# Altium PCB PCB1.PcbDoc
Units mm, origin at the board's own origin, x right, y up, seen from the top; angles counter-clockwise.
Board outline 80.23 x 55.21 mm, 2 copper layers (Top Layer, Bottom Layer), stack 1.671 mm thick; 128 components, 100 nets, 442 pads, 117 vias.
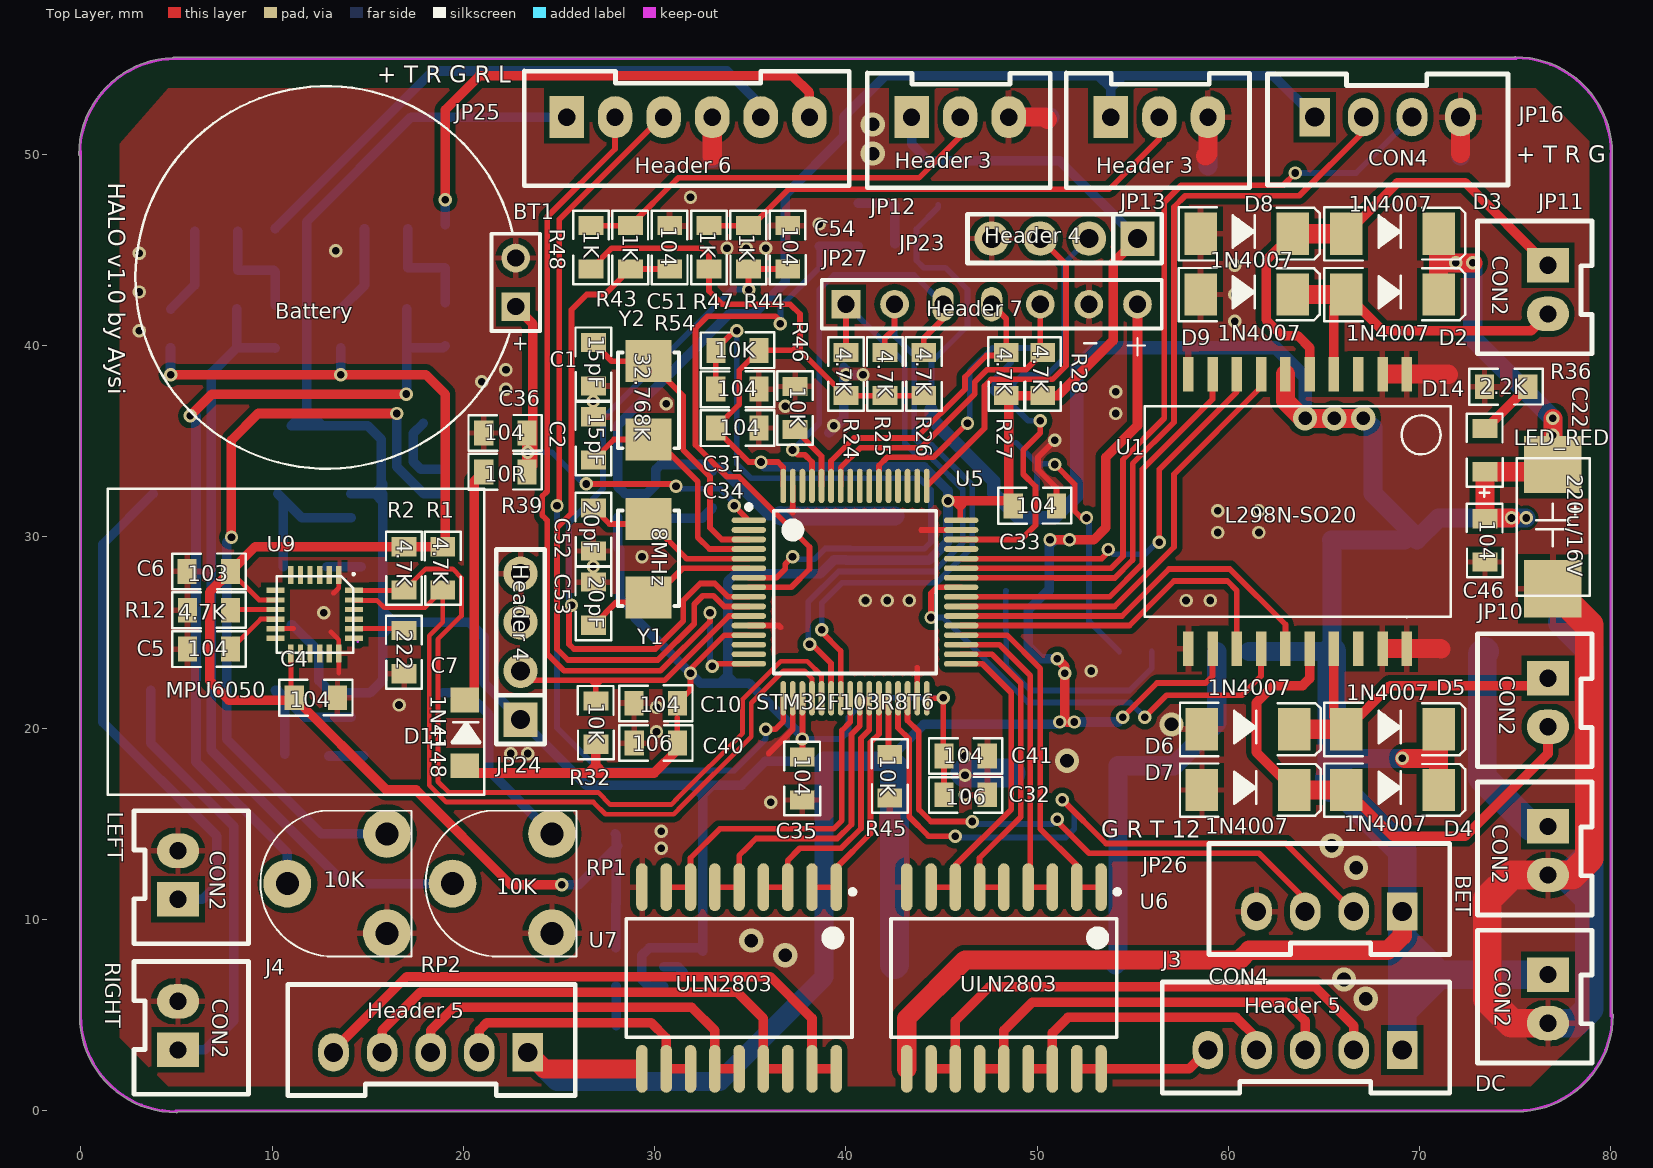
[diagram p0: Top Layer view]
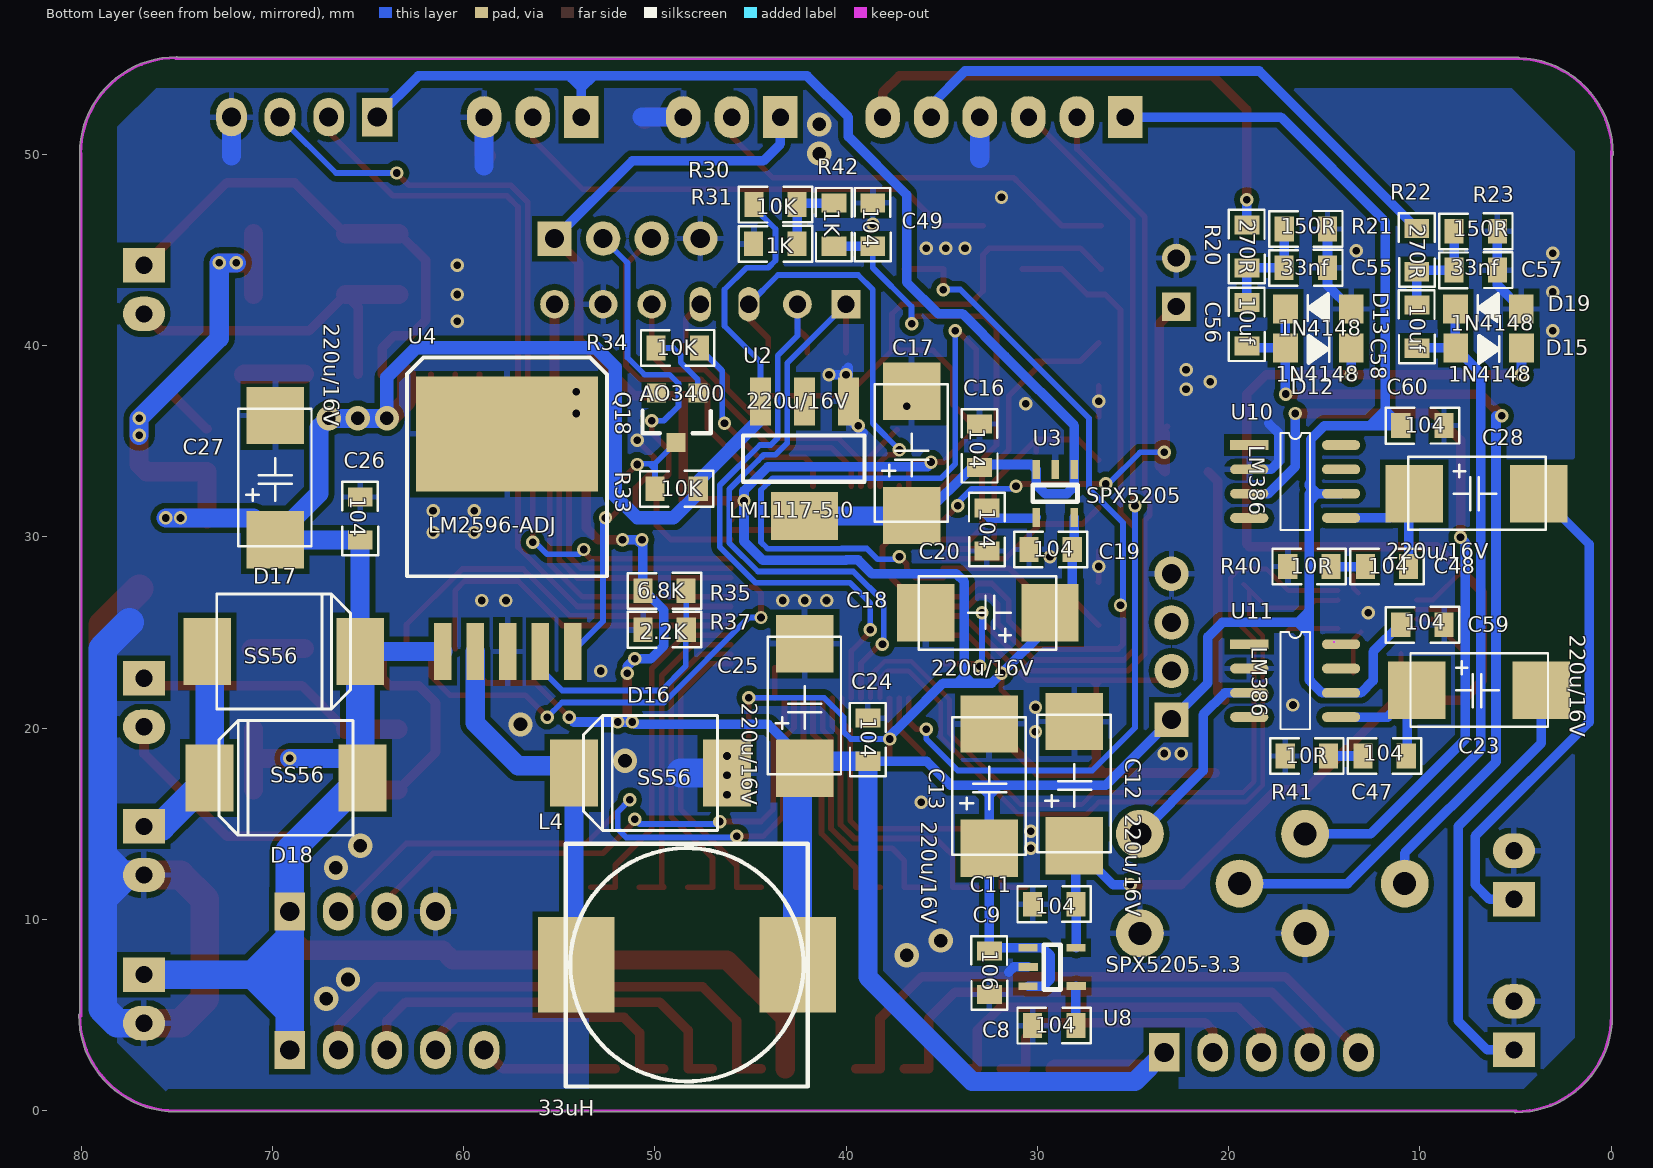
[diagram p1: Bottom Layer view, seen from below]

## Layer stack, top to bottom
Top Layer: signal copper 0.0356
Dielectric: core 1.6, FR-4, Dk 4.8
Bottom Layer: signal copper 0.0356

## Board outline
-0.064,4.953 -0.064,49.929 cw(c-0.047,49.991) -0.111,49.991 cw(c4.953,49.991) 4.799,55.053 cw(c4.835,55) 4.835,55.064 74.952,55.064 cw(c75.01,55.038) 75.01,55.102 cw(c75.01,50.038) 80.074,50.038 cw(c80.01,50.038) 80.064,50.004 80.064,5.064 cw(c80.057,5) 80.121,5 cw(c75.057,5) 75.057,-0.064 5.062,-0.064 cw(c5,-0.047) 5,-0.111 cw(c5,4.953)

## Design rules (kind name [scope] priority, off if disabled: settings)
Clearance Clearance_2 [IsRegion] p1: gap=0.3
Clearance Clearance_1 [(InNetClass('RRR'))] p2: gap=0.2
Clearance [All] p3: gap=0.3
PolygonConnect PolygonConnect_1 [IsVia] p1: connectstyle=Direct reliefconductorwidth=0.254 reliefentries=4 polygonreliefangle="90 Angle"
PolygonConnect [All] p2: connectstyle=Relief reliefconductorwidth=0.3 reliefentries=4 polygonreliefangle="90 Angle"
RoutingVias [All] p1: holewidth=0.4 width=0.7 viastyle="Through Hole" minholewidth=0.4 minwidth=0.7 maxholewidth=0.711 maxwidth=1.27
SilkToSilkClearance [All] p1: silktosilkclearance=0
SilkscreenOverComponentPads [All] p1: minsilkscreentomaskgap=0
SolderMaskExpansion [All] p1: expansion=0.102
TestPointUsage [All] p1: valid=0 allowmultiple=FALSE
Testpoint [All] p1: side=15 testpointundercomponent=TRUE minsize=1.016 maxsize=2.54 preferedsize=1.524 minholesize=0 maxholesize=1.016 preferedholesize=0.813 testpointgrid=0.025 style=1023 order=0-112345678
Width [All] p1: maxlimit=2 minlimit=0.254 preferedwidth=0.3
22 further rules are at their usual default settings.

## Classes and differential pairs
net class RRR: +3.3_2V +3.3V AD10 AD11 AD12 INT PA0 PA1 PA6 PA7 PA8 PA11 PA12 PB0 PB1 PB3 PB4 PB5 PB6 PB7 PB8 PB9 PB12 PB13 PB14 PB15 PC3 PC4 PC5 PC6 PC7 PC8 PC9 PC10 PC11 PC12 PD2 RX1 RX2 RX3 SCL SDA TX1 TX2 TX3

## Components (designator, comment, footprint, x,y, rotation, side; value= is the part's Value field where it differs from the comment)
BET "CON2" 2PIN2.54 76.708,14.859 r270 top
BT1 "Battery" BAT-2 22.733,43.307 r90 top
C1 "15pF" 0805 26.797,40.132 r270 top
C2 "15pF" 0805 26.797,34.036 r90 top
C4 "104" 0805 11.176,21.59 r0 top
C5 "104" 0805 5.588,24.13 r0 top
C6 "103" 0805 7.8,28.194 r180 top
C7 "222" 0805 16.892,22.86 r90 top
C8 "104" 0805 30.226,4.445 r180 bottom
C9 "106" 0805 32.512,6.096 r90 bottom
C10 "104" 0805 31.168,21.295 r180 top
C11 "104" 0805 30.226,10.795 r180 bottom
C12 "220u/16V" C7542 28.067,13.843 r270 bottom
C13 "220u/16V" C7542 32.512,13.716 r270 bottom
C16 "104" 0805 33.02,33.655 r90 bottom
C17 "220u/16V" C7542 36.576,31.115 r270 bottom
C18 "220u/16V" C7542 29.337,26.035 r180 bottom
C19 "104" 0805 28.194,29.337 r0 bottom
C20 "104" 0805 32.639,31.496 r270 bottom
C22 "220u/16V" C7542 76.962,33.782 r90 top
C23 "220u/16V" C7542 10.16,21.971 r0 bottom
C24 "104" 0805 38.862,18.288 r90 bottom
C25 "220u/16V" C7542 42.164,17.907 r270 bottom
C26 "104" 0805 65.405,29.845 r90 bottom
C27 "220u/16V" C7542 69.85,29.845 r270 bottom
C28 "220u/16V" C7542 10.287,32.258 r0 bottom
C31 "104" 0805 35.433,37.719 r180 top
C32 "104" 0805 47.371,16.51 r180 top
C33 "104" 0805 48.768,31.623 r0 top
C34 "104" 0805 35.433,35.687 r180 top
C35 "104" 0805 37.719,16.256 r90 top
C36 "104" 0805 21.082,35.433 r0 top
C40 "106" 0805 28.956,19.221 r0 top
C41 "106" 0805 47.371,18.542 r180 top
C46 "104" 0805 73.406,28.702 r90 top
C47 "104" 0805 12.954,18.542 r180 bottom
C48 "104" 0805 12.827,28.448 r180 bottom
C49 "104" 0805 38.608,45.212 r90 bottom
C51 "104" 0805 30.785,44.028 r90 top
C52 "20pF" 0805 26.797,31.496 r270 top
C53 "20pF" 0805 26.797,25.4 r90 top
C54 "104" 0805 36.957,44.028 r90 top
C55 "33nf" 0805 14.859,44.069 r0 bottom
C56 "10uf" 0805 19.05,40.005 r90 bottom
C57 "33nf" 0805 5.969,43.942 r0 bottom
C58 "10uf" 0805 10.16,39.878 r90 bottom
C59 "104" 0805 8.763,25.4 r0 bottom
C60 "104" 0805 8.763,35.814 r0 bottom
D2 "1N4007" SMA 66.167,42.672 r180 top
D3 "1N4007" SMA 66.167,45.847 r180 top
D4 "1N4007" SMA 66.167,16.764 r180 top
D5 "1N4007" SMA 66.167,19.939 r180 top
D6 "1N4007" SMA 58.613,19.939 r180 top
D7 "1N4007" SMA 58.613,16.764 r180 top
D8 "1N4007" SMA 58.547,45.847 r180 top
D9 "1N4007" SMA 58.547,42.672 r180 top
D11 "1N4148" D1206 20.066,18.034 r270 top
D12 "1N4148" D1206 17.031,39.878 r0 bottom
D13 "1N4148" D1206 13.589,41.91 r180 bottom
D14 "LED_RED" D0805 73.406,33.401 r270 top
D15 "1N4148" D1206 8.128,39.878 r0 bottom
D16 "SS56" SMC 46.228,17.653 r180 bottom
D17 "SS56" SMC 73.406,24.003 r0 bottom
D18 "SS56" SMC 65.278,17.399 r180 bottom
D19 "1N4148" D1206 4.699,41.91 r180 bottom
DC "CON2" 2PIN2.54 76.708,7.112 r270 top
J3 "Header 5" 5PIN2.54 69.088,3.175 r180 top
J4 "Header 5" 5PIN2.54 23.368,3.048 r180 top
JP10 "CON2" 2PIN2.54 76.708,22.606 r270 top
JP11 "CON2" 2PIN2.54 76.708,44.196 r270 top
JP12 "Header 3" 3PIN2.54 43.434,51.943 r0 top
JP13 "Header 3" 3PIN2.54 53.848,51.943 r0 top
JP16 "CON4" 4PIN2.54 64.516,51.943 r0 top
JP23 "Header 4" 4pin2.54-NEEDLE 55.245,45.593 r180 top
JP24 "Header 4" 4pin2.54-NEEDLE 22.987,20.447 r90 top
JP25 "Header 6" 6PIN2.54 25.4,51.943 r0 top
JP26 "CON4" 4PIN2.54 69.088,10.414 r180 top
JP27 "Header 7" HDR1X7 40.005,42.164 r0 top
L4 "33uH" SMD-12*12 54.102,7.62 r180 bottom
LEFT "CON2" 2PIN2.54 5.08,11.049 r90 top
Q18 "AO3400" SOT-23-3 48.895,34.925 r90 bottom
R1 "4.7K" 0805 18.923,29.464 r270 top
R2 "4.7K" 0805 16.891,29.464 r270 top
R12 "4.7K" 0805 5.588,26.162 r0 top
R20 "270R" 0805 19.05,44.069 r90 bottom
R21 "150R" 0805 17.071,46.101 r180 bottom
R22 "270R" 0805 10.16,46.101 r270 bottom
R23 "150R" 0805 5.969,45.974 r0 bottom
R24 "4.7K" 0805 40.005,39.624 r270 top
R25 "4.7K" 0805 42.037,39.624 r270 top
R26 "4.7K" 0805 44.069,39.624 r270 top
R27 "4.7K" 0805 48.387,39.624 r270 top
R28 "4.7K" 0805 50.292,39.624 r270 top
R30 "10K" 0805 44.803,47.371 r180 bottom
R31 "1K" 0805 42.591,45.323 r0 bottom
R32 "10K" 0805 26.924,19.177 r90 top
R33 "10K" 0805 47.752,32.512 r0 bottom
R34 "10K" 0805 49.911,39.878 r180 bottom
R35 "6.8K" 0805 48.387,27.178 r0 bottom
R36 "2.2K" 0805 73.406,37.846 r0 top
R37 "2.2K" 0805 50.599,25.146 r180 bottom
R39 "10R" 0805 21.082,33.401 r0 top
R40 "10R" 0805 16.891,28.448 r180 bottom
R41 "10R" 0805 17.018,18.542 r180 bottom
R42 "1K" 0805 40.64,45.212 r90 bottom
R43 "1K" 0805 28.727,44.028 r90 top
R44 "1K" 0805 34.9,44.028 r90 top
R45 "10K" 0805 42.291,18.595 r270 top
R46 "10K" 0805 37.338,37.846 r270 top
R47 "1K" 0805 32.842,44.028 r90 top
R48 "1K" 0805 26.67,44.028 r90 top
R54 "10K" 0805 33.221,39.751 r0 top
RIGHT "CON2" 2PIN2.54 5.08,3.175 r90 top
RP1 "10K" RP 24.638,9.271 r0 top
RP2 "10K" RP 16.002,9.271 r0 top
U1 "L298N-SO20" PowerSO20 71.628,36.83 r180 top
U2 "LM1117-5.0" SOT-223 39.878,37.084 r90 bottom
U3 "SPX5205" SOT-23-5 28.067,33.528 r90 bottom
U4 "LM2596-ADJ" TO-263-5 61.087,24.003 r270 bottom
U5 "STM32F103R8T6" LTQFP64 34.925,30.861 r0 top
U6 "ULN2803" SOIC-18 53.34,11.684 r180 top
U7 "ULN2803" SOIC-18 39.497,11.684 r180 top
U8 "SPX5205-3.3" SOT-23-5 30.48,8.509 r0 bottom
U9 "MPU6050" QFN4*4*0.9_24PIN 13.482,27.948 r270 top
U10 "LM386" SOP-8 18.923,34.798 r270 bottom
U11 "LM386" SOP-8 18.923,24.384 r270 bottom
Y1 "8MHz" SMD-5032 28.956,27.305 r270 top
Y2 "32.768K" SMD-5032 28.956,35.56 r270 top

## Footprints (in the part's own frame and the unit in brackets; to place one, negate y for a bottom-side part, rotate by r counter-clockwise, add the part's x,y. Pads: shape width x height; smd on the part's side, far side on the other; paste and mask are expansions set on the pad)
2PIN2.54 [mm]
  rect 1.8x2.2 hole 0.9: 1(0,0)
  oval 1.8x2.2 hole 0.9: 2(2.54,0)
  silkscreen extent -2.32,-3.69 4.63,2.3
3PIN2.54 [mm]
  rect 1.8x2.2 hole 0.9: 1(0,0)
  oval 1.8x2.2 hole 0.9: 2(2.54,0) 3(5.08,0)
  silkscreen extent -2.32,-3.69 7.25,2.3
4PIN2.54 [mm]
  rect 1.6x2 hole 1: 1(0,0)
  oval 1.6x2 hole 1: 2(2.54,0) 3(5.08,0) 4(7.62,0)
  silkscreen extent -2.48,-3.55 10.1,2.25
4pin2.54-NEEDLE [mm]
  rect 1.8x1.8 hole 1: 1(0,0)
  round 1.8 hole 1: 2(2.54,0) 3(5.08,0) 4(7.62,0)
  silkscreen extent -1.27,-1.27 8.89,1.27
5PIN2.54 [mm]
  rect 1.6x2 hole 1: 1(0,0)
  oval 1.6x2 hole 1: 2(2.54,0) 3(5.08,0) 4(7.62,0) 5(10.16,0)
  silkscreen extent -2.48,-3.55 12.55,2.25
6PIN2.54 [mm]
  rect 1.8x2.2 hole 0.9: 1(0,0)
  oval 1.8x2.2 hole 0.9: 2(2.53,0) 3(5.07,0) 4(7.61,0) 5(10.15,0) 6(12.69,0)
  silkscreen extent -2.21,-3.59 14.77,2.41, body extent -2.17,-3.57 14.77,2.25, height 10
0805 [mm]
  rect 1x1.3 smd: 1(-0.02,-0.002) 2(2.241,-0.002)
  silkscreen extent -0.81,-0.93 3.03,0.94, body extent 0,-0.55 2.25,0.55, height 1
BAT-2 [mm] "Multicell Battery; 2 Leads"
  rect 1.5x1.5 hole 0.9: 1(-1.27,0)
  round 1.5 hole 0.9: 2(1.27,0)
  silkscreen extent -2.54,-1.27 2.54,1.27
C7542 [mm]
  rect 3x3 smd: 1(0,0) 2(-6.5,0)
  silkscreen extent -6.86,-1.93 0.33,1.9, body extent -6.85,-1.92 0.33,1.9, height 3
D0805 [mm]
  rect 1x1.3 smd: 1(0,0) 2(-2.261,0)
  silkscreen extent -3.05,-0.94 1.3,0.93, body extent -2.27,-0.55 -0.02,0.55, height 1
D1206 [mm]
  rect 1.3x1.5 smd: 1(0,0) 2(-3.442,0.002)
  silkscreen extent -2.28,-0.63 -1.2,0.77
HDR1X7 [mm] "Connector; Header; 7 Position"
  rect 1.5x1.5 hole 0.9: 1(0,0)
  round 1.5 hole 0.9: 2(2.54,0) 5(10.16,0) 6(12.7,0) 7(15.24,0)
  oval 1.1x1.8 hole 0.9: 3(5.08,0) 4(7.62,0)
  silkscreen extent -1.27,-1.27 16.51,1.27
LTQFP64 [mm]
  oval 1.8x0.3 smd: 1(0,0) 2(0,-0.5) 3(0,-1) 4(0,-1.5) 5(0,-2) 6(0,-2.5) 7(0,-3) 8(0,-3.5) 9(0,-4) 10(0,-4.5) 11(0,-5) 12(0,-5.5) 13(0,-6) 14(0,-6.5) 15(0,-7) 16(0,-7.5) 33(11.1,-7.5) 34(11.1,-7) 35(11.1,-6.5) 36(11.1,-6) 37(11.1,-5.5) 38(11.1,-5) 39(11.1,-4.5) 40(11.1,-4) 41(11.1,-3.5) 42(11.1,-3) 43(11.1,-2.5) 44(11.1,-2) 45(11.1,-1.5) 46(11.1,-1) 47(11.1,-0.5) 48(11.1,0)
  oval 0.3x1.8 smd: 17(1.8,-9.3) 18(2.3,-9.3) 19(2.8,-9.3) 20(3.3,-9.3) 21(3.8,-9.3) 22(4.3,-9.3) 23(4.8,-9.3) 24(5.3,-9.3) 25(5.8,-9.3) 26(6.3,-9.3) 27(6.8,-9.3) 28(7.3,-9.3) 29(7.8,-9.3) 30(8.3,-9.3) 31(8.8,-9.3) 32(9.3,-9.3) 49(9.3,1.8) 50(8.8,1.8) 51(8.3,1.8) 52(7.8,1.8) 53(7.3,1.8) 54(6.8,1.8) 55(6.3,1.8) 56(5.8,1.8) 57(5.3,1.8) 58(4.8,1.8) 59(4.3,1.8) 60(3.8,1.8) 61(3.3,1.8) 62(2.8,1.8) 63(2.3,1.8) 64(1.8,1.8)
  silkscreen extent -0.12,-8 9.8,0.82, body extent 0.55,-8.75 10.55,1.25, height 1.6
PowerSO20 [mm]
  rect 0.55x1.8 smd: 1(2.3,-1.675) 2(3.57,-1.675) 3(4.84,-1.675) 4(6.11,-1.675) 5(7.38,-1.675) 6(8.65,-1.675) 7(9.92,-1.675) 8(11.19,-1.675) 9(12.46,-1.675) 10(13.73,-1.675) 11(13.73,12.675) 12(12.46,12.675) 13(11.19,12.675) 14(9.92,12.675) 15(8.65,12.675) 16(7.38,12.675) 17(6.11,12.675) 18(4.84,12.675) 19(3.57,12.675) 20(2.3,12.675)
  silkscreen extent 0,0 16,11.02, body extent 0.03,0 15.97,11, height 3.5
QFN4*4*0.9_24PIN [mm]
  rect 0.95x0.28 smd: 1(-0.05,0) 2(-0.05,-0.5) 3(-0.05,-1) 4(-0.05,-1.5) 5(-0.05,-2) 6(-0.05,-2.5) 13(4.05,-2.5) 14(4.05,-2) 15(4.05,-1.5) 16(4.05,-1) 17(4.05,-0.5) 18(4.05,0)
  rect 0.28x0.95 smd: 7(0.75,-3.3) 8(1.25,-3.3) 9(1.75,-3.3) 10(2.25,-3.3) 11(2.75,-3.3) 12(3.25,-3.3) 19(3.25,0.8) 20(2.75,0.8) 21(2.25,0.8) 22(1.75,0.8) 23(1.25,0.8) 24(0.75,0.8)
  silkscreen extent -0.16,-3.25 4,0.83, body extent 0,-3.25 4,0.75, height 1
RP [mm]
  round 2.5 hole 1.2: 1(0,0) 2(-5.207,2.6) 3(0,5.2)
  silkscreen extent -6.62,-1.22 1.28,6.41
SMA [mm]
  rect 1.7x2.2 smd: 1(0,0) 2(-4.82,0)
  silkscreen extent -6.22,-1.39 1.15,1.4, body extent -4.82,-1.2 0,1.2, height 2
SMC [mm]
  rect 2.5x3.5 smd: 1(0,0) 2(-8,0)
  silkscreen extent -7.5,-3 -0.5,3
SMD-12*12 [mm]
  rect 4x5 smd: 1(0,0) 2(11.562,0.006)
  silkscreen extent -0.55,-6.36 12.1,6.34, body extent -0.55,-6.32 12.1,6.32, height 7.5
SMD-5032 [mm]
  rect 2.2x2.4 smd: 1(0.475,0.725) 2(-3.625,0.725)
  silkscreen extent -4.07,-0.87 0.93,2.32, body extent -4.08,-0.85 0.92,2.3, height 1
SOIC-18 [mm]
  oval 0.6x2.5 smd: 1(0,0) 2(1.27,0) 3(2.54,0) 4(3.81,0) 5(5.08,0) 6(6.35,0) 7(7.62,0) 8(8.89,0) 9(10.16,0) 10(10.16,9.5) 11(8.89,9.5) 12(7.62,9.5) 13(6.35,9.5) 14(5.08,9.5) 15(3.81,9.5) 16(2.54,9.5) 17(1.27,9.5) 18(0,9.5)
  silkscreen extent -0.98,0.13 10.98,7.85, body extent -0.87,0.95 11.03,8.55, height 2.65
SOP-8 [mm]
  rect 0.51x2 smd: 1(0,0)
  oval 0.51x2 smd: 2(1.27,0) 3(2.54,0) 4(3.81,0) 5(3.81,4.8) 6(2.54,4.8) 7(1.27,4.8) 8(0,4.8)
  silkscreen extent -0.63,1.64 4.45,3.17, body extent -0.63,0.67 4.47,4.13, height 1.5
SOT-23-3 [mm]
  rect 1x1 smd: 1(0,0) 2(2.598,-1.143) 3(2.598,1.016)
  silkscreen extent 0.49,-1.82 1.66,1.75, body extent 0.48,-1.8 2.07,1.75, height 1
SOT-23-5 [mm]
  rect 1x0.4 smd: 1(0,0) 2(-0.002,0.996) 3(0,2) 4(-2.512,1.996) 5(-2.51,0)
  silkscreen extent -1.69,-0.16 -0.81,2.18, body extent -2.02,-0.25 -0.5,2.25, height 1
SOT-223 [mm]
  rect 2.5x1.1 smd: 1(0,0) 2(0,2.3) 3(0,4.6)
  rect 2.5x3.5 smd: 4(-6,2.3)
  silkscreen extent -4.2,-0.84 -1.78,5.51, body extent -4.23,-0.8 -1.75,5.5, height 1
TO-263-5 [mm]
  rect 3x0.9 smd: 1(0,0) 2(0,1.7) 3(0,3.4) 4(0,5.1) 5(0,6.8)
  rect 6x9.5 smd: 3(-11.379,3.353)
  silkscreen extent -15.37,-1.87 -3.93,8.58, body extent -14.38,-1.88 -3.93,8.57, height 4

## Part data
BET DC JP10 JP11 JP16 JP26 LEFT RIGHT: "Connector"
BT1: "Multicell Battery"
C1 C2 C40 C41 C52 C53: library part Cap, "Capacitor"
C4: library part CAP
C5 C6 C7 C8 C9 C10 C11 C16 C19 C20 C24 C26 C31 C32 C33 C34 C35 C36 C46 C47 C48 C49 C51 C54 C55 C56 C57 C58 C59 C60: library part CAP_W
C12 C13 C17 C18 C22 C23 C25 C27 C28: library part ELECTRO1_W
D2 D3 D4 D5 D6 D7 D8 D9 D11 D12 D13 D15 D16 D17 D18 D19: library part Diode, "Default Diode"
D14: library part Pro5E.tmp_UnNamed_101
J3 J4: "Header, 5-Pin"
JP12 JP13: "Header, 3-Pin"
JP23 JP24: "Header, 4-Pin"
JP25: "Header, 6-Pin"
JP27: "Header, 7-Pin"
L4: library part Pro4F.tmp_80uh_35
Q18: library part MOSFET-N, "N-Channel MOSFET"
R1 R2: library part RES2
R12 R20 R21 R22 R23 R24 R25 R26 R27 R28 R30 R31 R32 R33 R34 R35 R36 R37 R39 R40 R41 R42 R43 R44 R45 R46 R47 R48 R54: library part Res2, "Resistor"
RP1 RP2: library part "Res Tap", "Tapped Resistor"
U1: library part L298N
U2: library part LM1117IDT-3.3, "800mA Low-Dropout Linear Regulator, 3-pin TO-252"
U3: "VOLTAGE REGULATOR IC"
U4: library part LM2575-5
U5: "STM32 ARM-based 32-bit MCU with 64 Kbytes Flash, 64-pin LQFP, Industrial Temperature"
U6 U7: "SOIC"
U8: library part SPX5205
Y1 Y2: library part XTAL, "Crystal Oscillator"

## Via types
v1: diameter 0.7, hole 0.4, Top Layer to Bottom Layer, tented both sides, 95 vias
v2: diameter 1.27, hole 0.711, Top Layer to Bottom Layer, tented both sides, 13 vias
v3: diameter 0.7, hole 0.4, Top Layer to Bottom Layer, tented top, 4 vias
v4: diameter 0.7, hole 0.4, Top Layer to Bottom Layer, tented bottom, 4 vias
v5: diameter 0.7, hole 0.4, Top Layer to Bottom Layer, 1 vias

## Nets (pads, with @x,y where several pads share a name; then routed paths per layer and width w, separated by ;. In a path a pad name is that pad's centre, name@x,y a point inside that pad or via, vN(x,y) a via of type N, cw(c..) or ccw(c..) an arc to the next point about the centre after c; other vN are vias at no path point)
+3.3_2V: C4.1 C6.1 C11.2 C12.1 D12.2 D15.2 R1.1 R2.1 U8.5 U9.8 U9.13 | length 81.8
  Top Layer w0.254: C6.1 9.318,26.698 U9.8 ; C4.1@10.9,21.844 C4.1 10.982,21.762 U9.13
  Top Layer w0.5: v1(4.699,38.481) v1(13.589,38.481) 18.034,38.481 19.05,37.465 19.05,29.613 R1.1 R2.1 9.108,29.484 C6.1 6.731,27.107 6.731,22.479 7.747,21.463 11.031,21.463 C4.1 15.98,16.764 17.526,16.764 22.479,11.811 v1(25.146,11.811)
  Bottom Layer w0.5: D15.2 4.686,38.494 v1(4.699,38.481) ; v1(13.589,38.481) D12.2 ; v1(25.146,11.811) 26.035,11.811 C12.1 ; C12.1@27.94,14.478 27.985,14.433 C11.2 27.97,10.778 U8.5
+3.3V: C10.1 C18.1 C19.1 C32.2 C33.1 C34.2 C35.2 C40.2 C41.2 D11.1 JP12.1 JP23.1 R24.2 R25.2 R26.2 R27.2 R28.2 R32.1 R47.1 R48.1 R54.2 U3.5 U5.13 U5.19 U5.32 U5.48 U5.64 | length 165
  Top Layer w0.3: R48.1 27.748,45.085 32.512,45.085 32.844,44.753 R47.1 32.844,42.848 33.528,42.164 37.084,42.164 37.594,41.654 37.594,40.132 ; C40.2@31.188,18.869 31.188,20.535 ; C10.1 31.877,21.986 31.877,23.088 33.65,24.861 U5.13 ; 34.798,34.036 34.925,33.909 ; U5.64 36.725,33.633 36.449,33.909 v1(35.56,33.909) 34.925,33.909 ; 37.211,39.749 37.594,40.132 ; v1(37.719,19.431) 37.719,19.552 v1@37.725,19.558 ; C35.2@37.725,18.415 v1@37.725,19.558 ; U5.19 v1@37.725,19.558 ; R26.2 R24.2 39.96,37.383 37.594,39.749 ; U5.32 45.056,21.561 v1(45.085,21.59) 45.085,19.685 ; 45.085,19.384 45.085,19.685 ; C32.2 C41.2 ; C41.2@45.341,18.624 45.085,18.88 45.085,19.685 ; 45.72,31.877 45.72,31.75 45.974,31.496 ; 45.974,31.877 45.974,31.496 ; U5.48 45.974,30.912 45.974,31.496 ; 46.482,31.877 46.355,31.877 45.974,31.496 ; R27.2@48.195,37.383 R27.2@48.387,37.465 ; R27.2@48.748,37.236 R27.2@48.895,37.383 ; 34.925,33.909 33.192,35.642 C34.2 34.417,36.914 34.417,38.704 R54.2 37.594,39.749 ; 37.594,39.749 37.594,40.132
  Top Layer w0.5: D11.1@20.701,17.653 26.797,17.653 ; 26.289,17.653 26.545,17.653 26.926,18.034 ; R32.1 26.926,18.288 26.926,18.034 ; 27.432,17.653 27.307,17.653 26.926,18.034 ; C40.2@31.188,18.869 29.972,17.653 26.797,17.653 ; v1(45.339,31.877) 45.974,31.877 48.492,31.877 48.514,31.899 48.514,37.256 R27.2@48.641,37.383 ; R27.2@48.512,37.383 R28.2@50.417,37.383 ; R28.2@50.163,37.383 51.099,37.383 53.975,40.259 53.975,44.323 JP23.1 ; 26.797,17.653 26.926,17.782 26.926,18.034
  Bottom Layer w0.3: v1@37.725,19.558 37.852,19.431 39.751,19.431 40.132,19.812 40.132,20.574 41.148,21.59 v1(45.085,21.59) ; JP12.1 JP12.1@43.561,51.816
  Bottom Layer w0.5: U3.5 28.067,29.446 C19.1 28.174,26.817 28.956,26.035 28.956,25.781 32.385,22.352 33.782,22.352 ; 33.274,22.352 33.439,22.352 33.82,22.733 ; 34.163,22.352 34.163,22.39 33.82,22.733 ; v1(35.56,33.909) 35.56,33.849 35.744,33.665 44.027,33.665 44.082,33.665 45.339,32.408 45.339,32.131 45.339,29.76 44.363,28.784 39.993,28.784 39.983,28.794 39.375,28.794 38.648,28.067 34.233,28.067 33.82,27.654 33.82,22.733 ; v1@37.852,19.431 36.83,20.453 34.931,22.352 33.782,22.352 ; JP12.1 43.434,50.546 44.323,49.657 51.181,49.657 JP23.1 ; 33.782,22.352 33.82,22.39 33.82,22.733
  other v1: 31.877,22.86
+5V: C16.1 C17.1 JP13.1 JP16.1 U2.4 U3.1 U3.3 | length 74.9
  Bottom Layer w0.5: 28.067,34.417 U3.1 ; 28.067,35.179 28.067,35.306 ; 30.607,33.782 30.988,33.782 ; C16.1@32.966,33.687 C16.1 ; C16.1@33.018,33.44 C16.1 ; C17.1 35.944,31.115 33.424,33.635 C16.1 ; 53.213,54.102 53.848,53.467 ; JP13.1 53.848,52.959 53.848,53.467 ; 53.975,54.102 53.848,53.975 ; 54.991,54.102 62.357,54.102 JP16.1 ; 55.499,54.102 42.037,54.102 39.878,51.943 39.878,50.927 36.83,47.879 36.83,43.307 35.179,41.656 34.674,41.656 34.663,41.667 33.917,41.667 31.685,39.435 28.067,35.817 U3.1 ; U3.1 28.067,32.639 28.448,32.258 29.591,32.258 30.067,32.734 U3.3 30.321,33.782 30.988,33.782 ; 30.988,33.782 32.871,33.782 C16.1 ; 53.848,53.467 53.848,53.975 ; 53.848,53.467 54.356,53.975 54.356,54.102 54.229,53.975 53.848,53.975
  Bottom Layer w1: C17.1 36.607,31.084 U2.4@42.559,31.084
+12V: C22.1 C26.1 C27.1 C46.2 D2.2 D3.2 D4.2 D5.2 D14.1 D17.2 D18.1 DC.1 J3.1 JP26.1 R30.1 R33.1 U1.6 U2.3 U4.1 U6.10 | length 188
  Top Layer w1: U6.10 43.18,4.826 46.228,7.874 60.579,7.874 61.087,8.382 68.326,8.382 69.088,9.144 JP26.1 ; U1.6 62.978,37.098 63.754,36.322 63.881,36.195 v2(67.056,36.195) ; v1@69.215,18.415 70.987,18.415 ; D4.2 70.987,18.415 ; D5.2 70.987,18.415 ; D2.2 70.987,44.323 ; D3.2 70.987,44.323 ; v1(72.771,44.323) 70.987,44.323 ; v1(74.803,30.988) 73.453,30.988 C46.2 73.408,33.399 D14.1 76.581,33.401 C22.1 v1(76.962,36.195) v1@76.962,35.56
  Bottom Layer w0.3: U2.3 44.478,39.144 46.355,41.021 46.355,42.926 45.212,44.069 44.069,44.069 43.688,44.45 43.688,46.101 44.824,47.237 R30.1
  Bottom Layer w0.7: U2.3@44.45,36.675 44.45,36.195 47.732,32.913 47.732,32.278 49.022,30.988 50.927,30.988 52.07,32.131 52.07,38.862 53.086,39.878 62.484,39.878 64.008,38.354 v2(64.008,36.195)
  Bottom Layer w1: U4.1 D17.2 65.406,29.822 C26.1 69.195,29.825 C27.1@69.215,29.845 ; v2(64.008,36.195) v2(67.056,36.195) 67.55,35.701 67.55,32.272 69.85,29.972 C27.1 70.993,30.988 v1(74.803,30.988) v1(75.565,30.988) ; D18.1@65.278,16.637 D18.1@65.406,16.765 ; D18.1 66.294,18.415 v1(69.088,18.415) ; v1(71.882,44.323) v1(72.771,44.323) 72.771,40.386 v1(76.962,36.195) v1(76.962,35.306)
  Bottom Layer w1.5: D18.1 69.088,13.589 JP26.1 ; D18.1@65.406,17.527 D17.2 ; J3.1 JP26.1 ; 69.088,5.334 69.215,5.334 70.993,7.112 ; 69.088,6.985 69.215,7.112 70.231,7.112 ; DC.1@76.2,7.112 70.231,7.112 ; JP26.1 69.088,9.017 70.993,7.112 ; 70.231,7.112 70.993,7.112
  other v2: 65.532,36.195
AD10: C49.1 R42.1 U5.8 | length 30.7
  Top Layer w0.3: U5.8 37.14,27.361 38.1,28.321 38.1,29.464 34.417,33.147 33.782,33.147 32.131,34.798 32.131,40.894 32.766,41.529 36.322,41.529 v1@36.576,41.275
  Bottom Layer w0.3: v1(36.576,41.148) 36.576,42.037 38.606,44.067 C49.1
  Bottom Layer w0.5: C49.1 R42.1
AD11: C54.1 R44.1 U5.9 | length 38.1
  Top Layer w0.3: v1(25.654,26.416) 25.527,26.289 25.527,24.384 25.781,24.13 30.03,24.13 31.496,25.596 31.496,26.67 32.385,27.559 33.147,27.559 33.845,26.861 U5.9 ; v1(34.925,42.926) 34.915,42.926 34.902,42.939 R44.1 C54.1
  Bottom Layer w0.3: v1(25.654,26.416) 25.527,26.543 25.527,30.734 27.305,32.512 27.305,36.195 34.036,42.926 v1(34.925,42.926)
AD12: C51.1 R43.1 U5.10 | length 36.6
  Top Layer w0.3: C51.1 R43.1 27.393,42.672 26.448,42.672 25.654,41.878 25.654,31.242 24.892,30.48 24.892,24.13 25.465,23.557 30.164,23.557 32.066,25.459 32.066,26.478 32.512,26.924 33.075,26.924 33.638,26.361 U5.10
GND: BET.2 BT1.2 C1.2 C2.2 C4.2 C5.1 C6.2 C7.1 C8.1 C9.1 C10.2 C11.1 C12.2 C13.2 C16.2 C17.2 C18.2 C19.2 C20.2 C22.2 C24.2 C25.2 C26.2 C27.2 C31.1 C32.1 C33.2 C34.1 C35.1 C36.1 C40.1 C41.1 C46.1 C49.2 C51.2 C52.2 C53.2 C54.2 C55.1 C57.1 C59.1 C60.1 D6.1 D7.1 D8.1 D9.1 D13.1 D16.1 D19.1 DC.2 JP12.3 JP13.3 JP16.4 JP23.4 JP24.4 JP25.4 JP26.4 JP27.6 LEFT.2 Q18.3 R12.1 R21.2 R23.1 R31.2 R36.1 R37.1 R40.1 R41.1 R45.2 R46.1 RIGHT.2 RP1.1 RP2.1 U1.1 U1.2 U1.10 U1.11 U1.19 U1.20 U2.1 U3.2 U4.3 U5.12 U5.18 U5.31 U5.47 U5.63 U6.9 U7.9 U8.2 U9.1 U9.11 U9.18 U10.2 U11.2 | length 125.5
  Top Layer w0.254: U9.11 11.124,25.198 ; 13.081,25.019 13.482,24.618 U9.18 13.482,22.88 ; 13.208,27.051 13.482,27.325 U9.1
  Top Layer w0.3: C52.2 v1(26.795,28.448) 26.795,27.645 C53.2 ; C1.2 v1(26.795,37.084) 26.795,36.281 C2.2 ; v1@31.75,47.625 v1(31.877,47.752) ; U5.12 36.488,25.361 36.576,25.273 ; 35.967,18.669 37.225,19.927 U5.18 ; 37.225,31.256 U5.63 ; U5.31 43.725,23.151 ; 43.942,30.353 43.95,30.361 U5.47 ; v1(50.927,35.052) 50.038,34.163 50.038,33.528 51.009,32.557 C33.2
  Top Layer w1: JP25.4 33.01,49.921 33.02,49.911 ; JP12.3 50.419,51.943 50.546,51.816 ; 58.801,49.911 58.928,50.038 JP13.3 ; U1.19@68.326,24.155 71.095,24.155 71.12,24.13 ; U1.2@68.326,38.505 71.477,38.505 71.501,38.481 ; 72.136,50.038 JP16.4
  Top Layer w1.5: BET.2@76.2,12.319 77.978,12.319 78.858,13.199 78.858,25.386 C22.2 ; DC.2@76.327,4.572 74.803,4.572 73.533,5.842 73.533,11.049 74.803,12.319 BET.2@76.327,12.319
  Bottom Layer w0.3: v1(50.927,35.052) v1@50.965,35.09
  Bottom Layer w0.5: D19.1 5.949,43.16 C57.1 R23.1 ; D13.1 14.83,43.151 R21.2 ; 17.907,35.941 17.373,35.407 17.373,33.935 17.78,33.528 U10.2 ; U8.2 31.222,7.513 31.496,7.239 ; 39.116,35.433 39.878,36.195 U2.1 39.878,38.862 40.005,38.735 v1(40.005,38.481) v1(40.894,38.481)
  Bottom Layer w1: JP25.4 33.01,49.794 33.02,49.784 ; JP12.3 50.673,51.943 ; 58.928,49.403 JP13.3 ; 72.136,49.911 JP16.4
  Bottom Layer w1.5: D16.1 48.641,17.653 ; DC.2@76.581,4.572 78.105,4.572 78.858,5.325 78.858,11.077 ; BET.2@76.581,12.319 77.617,12.319 78.858,11.077 ; BET.2 77.842,12.319 78.858,13.335 ; 77.47,25.527 78.858,24.139 78.858,11.077
  other v1: 30.353,13.716 30.353,14.605 36.068,16.129 46.228,16.51 46.228,18.542 22.479,18.669 23.368,18.669 30.099,19.812 30.099,21.082 16.637,21.209 52.832,22.987 12.7,26.035 41.021,26.67 42.164,26.67 43.307,26.67 57.785,26.67 59.055,26.67 29.337,28.956 39.37,35.814 30.607,36.957 22.225,37.719 20.955,38.1 22.225,38.735 3.048,40.767 60.325,41.275 60.325,42.672 3.048,42.799 60.325,44.196 3.048,44.831 13.335,44.958 33.782,45.085 34.798,45.085 35.814,45.085 38.608,46.355
  other v2: 67.183,5.842 66.04,6.858 36.83,8.128 35.052,8.89 66.675,12.7 65.405,13.843 51.562,18.288 57.023,20.193 41.402,50.038 41.402,51.562
  other v3: 46.228,17.526 54.102,36.449 36.83,36.83 54.102,37.592
  other v4: 59.436,30.226 61.595,30.226 59.436,31.369 61.595,31.369
INT: U9.12
ML: JP25.6 R20.2 | length 27.4
  Top Layer w0.5: v1(19.05,47.625) 19.05,52.324 20.828,54.102 37.211,54.102 38.09,53.223 JP25.6
  Bottom Layer w0.5: R20.2 19.05,46.312 v1(19.05,47.625)
MR: JP25.5 R22.1 | length 30.2
  Bottom Layer w0.5: R22.1 18.397,54.356 33.782,54.356 35.55,52.588 JP25.5
NetBET_1: BET.1 D17.1 D18.2 | length 10.2
  Bottom Layer w1.5: D17.1 73.278,23.875 D18.2 BET.1@75.818,14.859
NetBT1_1: BT1.1 C36.2 R39.2 U5.1 | length 24.4
  Top Layer w0.3: C36.2@23.196,35.769 C36.2@23.243,35.769 ; v1(26.416,32.766) 30.988,32.766 v1(31.115,32.639) ; 34.417,31.369 U5.1
  Top Layer w0.5: BT1.1 23.622,41.148 23.622,36.576 ; C36.2 R39.2 23.622,33.698 23.622,36.576 ; 23.622,36.322 23.622,36.576
  Bottom Layer w0.3: v1(23.368,34.417) 24.638,34.417 26.289,32.766 v1(26.416,32.766) ; v1(31.115,32.639) 31.242,32.512 33.431,32.512 34.163,31.78 v1@34.163,31.496
  other v1: 34.163,31.623
NetC1_1: C1.1 U5.3 Y2.2 | length 16
  Top Layer w0.3: C1.1 27.762,39.185 Y2.2@30.062,39.185 ; Y2.2 31.496,37.37 31.496,34.544 32.893,33.147 32.893,32.46 32.893,30.48 33.512,29.861 U5.3
NetC2_1: C2.1 U5.4 Y2.1 | length 13.3
  Top Layer w0.3: C2.1 27.868,35.085 Y2.1@30.062,35.085 ; Y2.1@30.062,34.442 Y2.1@30.062,35.085 ; U5.4 33.885,29.361 32.869,29.361 32.258,29.972 32.258,32.246 32.258,32.889 Y2.1@30.062,35.085
NetC5_2: C5.2 U9.10 | length 3
  Top Layer w0.254: C5.2 9.399,25.698 U9.10
NetC7_2: C7.2 U9.20 | length 2.7
  Top Layer w0.254: U9.20 16.796,25.198 C7.2
NetC8_2: C8.2 U8.4 | length 2.1
  Bottom Layer w0.5: U8.4 27.985,6.496 C8.2
NetC20_1: C20.1 U3.4 | length 3.2
  Bottom Layer w0.5: U3.4 30.097,30.982 32.488,30.982 C20.1@33.022,31.516
NetC23_1: C23.1 C47.2 U11.5 | length 8
  Bottom Layer w0.5: C23.1 10.668,21.463 C47.2@10.668,18.622 ; C23.1@10.287,21.971 11.684,20.574 U11.5
NetC23_2: C23.2 RIGHT.1 | length 22.6
  Bottom Layer w0.5: C23.2 3.66,19.2 8.001,14.859 8.001,4.699 6.477,3.175 RIGHT.1
NetC28_1: C28.1 C48.2 U10.5 | length 8.3
  Bottom Layer w0.5: C48.2 10.586,31.959 C28.1 11.557,30.988 U10.5
NetC28_2: C28.2 LEFT.1 | length 26.4
  Bottom Layer w0.5: C28.2 1.143,29.614 1.143,20.32 7.112,14.351 7.112,11.811 6.35,11.049 LEFT.1
NetC31_2: C31.2 R54.1 U5.7 | length 34.7
  Top Layer w0.3: C31.2 33.201,37.73 R54.1 33.201,39.805 34.163,40.767 v1(34.29,40.767) ; U5.7 36.37,27.861 36.83,28.321 36.83,28.575 v1(37.211,28.956)
  Bottom Layer w0.3: v1(34.29,40.767) 34.29,33.808 35.033,33.065 43.833,33.065 44.45,32.448 44.45,32.131 ; v1(37.211,28.956) 37.338,28.829 38.354,28.829 38.919,29.394 40.232,29.394 40.242,29.384 44.114,29.384 44.45,29.72 44.45,32.321
NetC47_1: C47.1 R41.2 | length 1.8
  Bottom Layer w0.5: C47.1 R41.2
NetC48_1: C48.1 R40.2 | length 1.8
  Bottom Layer w0.5: C48.1 R40.2
NetC52_1: C52.1 U5.5 Y1.2 | length 9.4
  Top Layer w0.3: C52.1 27.635,30.676 Y1.2@30.062,30.676 ; Y1.2@29.845,30.676 31.66,28.861 U5.5
NetC53_1: C53.1 U5.6 Y1.1 | length 9.7
  Top Layer w0.3: C53.1 27.995,26.576 Y1.1@30.062,26.576 ; Y1.1@29.681,26.576 31.466,28.361 U5.6
NetC55_2: C55.2 C56.2 R20.1 R21.1 | length 5.8
  Bottom Layer w0.5: R21.1 17.1,46.09 C55.2 19.026,44.071 R20.1 C56.2
NetC56_1: C56.1 D12.1 D13.2 RP2.2 | length 45
  Top Layer w0.5: v1(5.715,36.322) 6.858,37.465 v1(17.018,37.465)
  Bottom Layer w0.5: v1(5.715,36.322) 6.017,36.322 6.02,36.319 6.02,18.237 10.795,13.462 RP2.2 ; v1(17.018,37.465) 17.031,37.478 D13.2 ; D12.1 18.941,39.878 C56.1
NetC57_2: C57.2 C58.2 R22.2 R23.2 | length 5.8
  Bottom Layer w0.5: R23.2 C57.2 10.078,43.944 R22.2 10.162,42.123 C58.2
NetC58_1: C58.1 D15.1 D19.2 RP1.2 | length 41.2
  Bottom Layer w0.5: D19.2 8.141,39.891 D15.1 ; C58.1 10.138,39.878 D15.1 ; RP1.2 13.783,11.871 6.82,18.834 6.82,38.57 D15.1
NetD2_1: D2.1 D9.2 JP11.2 U1.4 | length 19.4
  Top Layer w0.5: U1.4 65.518,42.023 D2.1 68.072,40.767 75.819,40.767 JP11.2
  Top Layer w1: D9.2 D2.1 D2.1@65.659,42.672
NetD3_1: D3.1 D8.2 JP11.1 U1.5 | length 25.6
  Top Layer w0.5: D8.2 61.967,44.447 61.967,41.344 62.798,40.513 63.627,40.513 64.248,39.892 U1.5 ; D3.1 68.834,48.514 72.39,48.514 JP11.1
  Top Layer w1: D8.2 D3.1
NetD4_1: D4.1 D7.2 JP10.2 U1.16 | length 27.7
  Top Layer w0.5: D7.2 61.468,18.73 61.468,21.336 62.357,22.225 63.881,22.225 64.248,22.592 U1.16 ; D4.1 68.58,14.351 72.39,14.351 76.708,18.669 JP10.2
  Top Layer w1: D7.2 D4.1
NetD5_1: D5.1 D6.2 JP10.1 U1.17 | length 18.9
  Top Layer w0.5: U1.17 65.518,20.588 D5.1 68.453,22.225 76.327,22.225 JP10.1
  Top Layer w1: D6.2 D5.1
NetD11_2: D11.2 R39.1 | length 12.3
  Top Layer w0.5: D11.2@20.193,21.463 20.574,21.844 20.574,32.911 R39.1
NetD14_K: D14.2 R36.2 | length 3.1
  Top Layer w0.5: D14.2 73.464,35.662 R36.2
NetD16_2: D16.2 L4.1 U4.2 | length 20.3
  Bottom Layer w1: L4.1 54.228,7.746 54.228,18.034 57.15,18.034 59.387,20.271 U4.2
NetJ3_2: J3.2 U6.11 U6.12 | length 27.5
  Top Layer w0.5: U6.11 U6.12 45.72,4.699 47.498,6.477 64.516,6.477 66.548,4.445 J3.2
NetJ3_3: J3.3 U6.13 U6.14 | length 21.6
  Top Layer w0.5: U6.13 U6.14 48.26,4.191 49.746,5.677 63.03,5.677 64.008,4.699 J3.3
NetJ3_4: J3.4 U6.15 U6.16 | length 15.2
  Top Layer w0.5: U6.15 U6.16 50.8,4.064 51.613,4.877 60.401,4.877 61.468,3.81 J3.4
NetJ3_5: J3.5 U6.17 U6.18 | length 7.3
  Top Layer w0.5: U6.17 U6.18 57.937,2.184 J3.5
NetJ4_2: J4.2 U7.11 U7.12 | length 14.3
  Top Layer w0.5: J4.2 20.828,4.191 21.235,4.598 29.819,4.598 30.607,3.81 U7.11 U7.12
NetJ4_3: J4.3 U7.13 U7.14 | length 20.3
  Top Layer w0.5: J4.3 18.288,4.191 19.495,5.398 31.94,5.398 33.147,4.191 U7.13 U7.14
NetJ4_4: J4.4 U7.15 U7.16 | length 26.4
  Top Layer w0.5: J4.4 15.748,4.191 17.755,6.198 34.315,6.198 35.687,4.826 U7.15 U7.16
NetJ4_5: J4.5 U7.17 U7.18 | length 31.5
  Top Layer w0.5: J4.5 13.208,3.175 17.031,6.998 36.055,6.998 38.227,4.826 U7.17 U7.18
NetJP12_2: JP12.2 R43.2 R48.2 | length 22.3
  Top Layer w0.3: R48.2 R43.2 31.172,48.711 ; 31.108,48.648 31.172,48.711 ; JP12.2 45.974,50.927 43.815,48.768 31.228,48.768 31.172,48.711
NetJP13_2: JP13.2 R44.2 R47.2 | length 26.6
  Top Layer w0.3: R47.2 R44.2 35.088,46.269 36.987,48.168 53.756,48.168 56.388,50.8 JP13.2
NetJP23_2: JP23.2 U5.46 | length 23.5
  Top Layer w0.3: U5.46 49.165,29.861 49.911,30.607 49.911,32.639 49.276,33.274 49.276,33.528 49.276,34.544 50.165,35.433 v1(50.165,36.068) ; JP23.2@52.705,45.339 JP23.2
  Bottom Layer w0.3: v1(50.165,36.068) 49.53,36.068 48.768,36.83 48.768,38.017 49.232,38.481 50.546,38.481 51.435,39.37 51.435,44.323 ; 51.498,44.386 51.435,44.323 ; JP23.2 51.435,44.323
NetJP23_3: JP23.3 U5.49 | length 18.4
  Top Layer w0.3: U5.49 47.182,35.618 47.244,35.68 47.244,37.887 47.59,38.233 50.8,38.233 51.505,38.938 51.505,44.253 JP23.3
NetQ18_1: Q18.1 R33.2 U4.5 | length 15.6
  Top Layer w0.3: v1(50.927,33.782) 51.959,32.75 51.959,31.353 52.324,30.988 v1(52.578,30.988)
  Bottom Layer w0.3: Q18.1 49.993,33.827 ; R33.2 49.993,33.827 ; 49.993,33.528 50.292,33.827 ; v1(50.927,33.782) 50.882,33.827 50.292,33.827 ; v1(52.578,30.988) 52.705,30.861 52.705,25.585 U4.5 ; 49.993,33.827 50.292,33.827
NetQ18_2: Q18.2 R34.1 | length 4.1
  Bottom Layer w0.3: Q18.2@47.625,37.722 47.625,37.65 Q18.2 ; Q18.2@47.81,37.523 Q18.2 ; R34.1 49.02,39.876 48.641,39.497 48.641,39.116 47.752,38.227 Q18.2
NetR12_2: R12.2 U9.9 | length 2.4
  Top Layer w0.254: R12.2 7.867,26.198 U9.9
NetR30_2: R30.2 R31.1 R42.2 | length 4
  Bottom Layer w0.5: R42.2 42.479,47.453 R30.2 42.563,45.333 R31.1
NetR35_1: R35.1 R37.2 U4.4 | length 13.4
  Bottom Layer w0.3: R35.1 48.358,27.171 R37.2 48.387,25.115 48.387,23.241 49.657,21.971 54.841,21.971 55.987,23.117 U4.4
NetR45_1: R45.1 U5.28 | length 3
  Top Layer w0.3: U5.28 42.225,18.679 R45.1
NetR46_2: R46.2 U5.60 | length 3.5
  Top Layer w0.3: R46.2 38.725,34.216 U5.60
NetRP1_3: RP1.3 U11.3 | length 10.5
  Bottom Layer w0.5: U11.3 20.193,21.844 21.336,20.701 21.336,17.773 RP1.3
NetRP2_3: RP2.3 U10.3 | length 41.2
  Top Layer w0.5: v1(7.874,29.972) 7.874,35.052 9.271,36.449 v5(16.51,36.449)
  Bottom Layer w0.5: v1(7.874,29.972) 7.62,29.718 7.62,19.431 12.58,14.471 RP2.3 ; v5(16.51,36.449) 16.51,33.667 16.573,33.604 17.919,32.258 U10.3
PA0: U5.14
PA1: U5.15
PA6: JP27.1 R24.1 U5.22 | length 32.9
  Top Layer w0.3: v1@38.1,24.257 38.354,24.257 39.225,23.386 U5.22 ; R24.1 40.003,42.162 JP27.1
  Bottom Layer w0.3: v1@38.1,24.257 38.035,24.322 38.035,26.605 39.624,28.194 39.735,28.194 39.745,28.184 44.611,28.184 46.109,29.682 46.109,32.486 44.611,33.984 44.305,34.29 43.688,34.29 43.078,34.9 43.078,39.091 JP27.1
  other v1: 38.1,24.384
PA7: JP27.2 R25.1 U5.23 | length 31.9
  Top Layer w0.3: v1(38.735,25.146) 38.735,25.019 39.725,24.029 U5.23 ; R25.1 42.035,40.386 42.545,40.896 JP27.2
  Bottom Layer w0.3: v1(38.735,25.146) 38.735,26.543 39.794,27.602 44.737,27.602 46.609,29.474 46.609,32.694 44.505,34.798 43.942,34.798 43.578,35.162 43.578,39.48 42.545,40.513 JP27.2
PA8: U1.14 U5.41 | length 24.7
  Top Layer w0.3: v1(44.45,25.781) 44.45,27.051 44.76,27.361 U5.41 ; v1(55.626,20.574) 56.769,21.717 60.706,21.717 61.708,22.719 U1.14
  Bottom Layer w0.3: v1(44.45,25.781) 45.085,25.781 49.522,21.344 54.856,21.344 v1(55.626,20.574)
PA11: U1.8 U5.44 | length 21.5
  Top Layer w0.3: U5.44 53.372,28.861 53.721,29.21 v1(53.721,29.337) ; v1(56.388,29.718) 56.388,33.528 60.438,37.578 U1.8
  Bottom Layer w0.3: v1(53.721,29.337) 53.975,29.083 55.626,29.083 56.261,29.718 v1(56.388,29.718)
PA12: U5.45
PB0: U5.26 U7.3 U7.4 | length 14.2
  Top Layer w0.3: U7.4 U7.3 36.957,13.081 37.592,13.716 39.751,13.716 40.789,14.754 40.789,19.467 41.225,19.903 U5.26
PB1: U5.27 U7.1 U7.2 | length 12.3
  Top Layer w0.3: U7.2@38.481,11.684 U7.2 U7.1 39.497,12.7 41.289,14.492 41.289,19.26 41.725,19.696 U5.27
PB3: U5.55
PB4: U5.56
PB5: U5.57
PB6: JP27.5 R28.1 U5.58 | length 16.9
  Top Layer w0.3: U5.58 39.725,33.618 40.77,34.663 43.934,34.663 46.736,37.465 46.736,38.1 47.369,38.733 49.401,38.733 50.163,39.495 50.163,42.162 JP27.5
PB7: JP27.4 R27.1 U5.59 | length 15.6
  Top Layer w0.3: U5.59 39.225,33.963 40.425,35.163 43.672,35.163 46.228,37.719 46.228,38.354 47.355,39.481 47.841,39.481 R27.1@48.004,39.644 ; JP27.4@47.623,42.162 JP27.4 48.385,41.404 R27.1
PB8: JP27.3 R26.1 U5.61 | length 21.9
  Top Layer w0.3: v1(37.211,34.544) 37.465,34.29 37.846,34.29 38.225,33.911 U5.61 ; R26.1 44.067,40.386 45.085,41.404 JP27.3
  Bottom Layer w0.3: v1(37.211,34.544) 38.608,35.941 38.608,42.926 39.37,43.688 43.561,43.688 JP27.3
PB9: U5.62
PB12: U5.33 U6.7 U6.8 | length 15.9
  Top Layer w0.3: U6.8 U6.7 45.72,12.827 48.641,15.748 48.641,21.844 47.124,23.361 U5.33
PB13: U5.34 U6.5 U6.6 | length 16.6
  Top Layer w0.3: U5.34 47.64,23.861 49.141,22.36 49.141,15.359 46.99,13.208 U6.6 U6.5
PB14: U5.35 U6.3 U6.4 | length 16.7
  Top Layer w0.3: U5.35 48.029,24.361 49.641,22.749 49.641,11.795 U6.4 U6.3
PB15: U5.36 U6.1 U6.2 | length 18.5
  Top Layer w0.3: U5.36 48.418,24.861 50.165,23.114 50.165,14.732 52.07,12.827 U6.2 U6.1 U6.1@53.213,11.684
PC3: JP24.2 R32.2 U5.11 | length 15.3
  Top Layer w0.3: JP24.2@23.114,22.987 23.606,22.495 26.67,22.495 ; R32.2 26.926,22.366 ; 26.926,22.098 26.926,22.239 ; 27.305,22.495 27.182,22.495 26.926,22.239 ; U5.11 33.882,25.861 30.516,22.495 26.67,22.495 ; 26.67,22.495 26.926,22.239
PC4: U5.24 U7.7 U7.8 | length 18.1
  Top Layer w0.3: U7.8 U7.7 31.877,13.208 33.401,14.732 39.353,14.732 39.789,15.168 39.789,19.881 40.225,20.317 U5.24
PC5: U5.25 U7.5 U7.6 | length 16.2
  Top Layer w0.3: U7.6 U7.5 34.417,13.335 34.798,13.716 35.306,14.224 39.552,14.224 40.289,14.961 40.289,19.674 40.725,20.11 U5.25
PC6: U1.13 U5.37 | length 18.6
  Top Layer w0.3: U5.37 54.825,25.361 57.15,27.686 59.944,27.686 60.438,27.192 U1.13
PC7: U1.15 U5.38 | length 20.4
  Top Layer w0.3: U5.38 54.436,25.861 56.896,28.321 60.071,28.321 62.978,25.414 U1.15
PC8: U1.7 U5.39 | length 23.3
  Top Layer w0.3: U5.39 54.047,26.361 57.15,29.464 57.15,33.274 61.708,37.832 U1.7
PC9: U1.9 U5.40 | length 21.6
  Top Layer w0.3: U5.40 53.785,26.861 55.499,28.575 55.499,33.528 59.168,37.197 U1.9
PC10: U5.51
PC11: U5.52
PC12: U5.53
PD2: R34.2 U5.54 | length 11.1
  Top Layer w0.3: U5.54 41.725,33.724 42.164,34.163 44.577,34.163 46.28,35.866 46.28,36.016 v1@46.355,36.068
  Bottom Layer w0.3: v1@46.355,36.068 46.482,36.195 46.482,38.688 46.506,38.711 R34.2
  other v1: 46.355,35.941
RX1: JP16.3 U5.43 | length 42.9
  Top Layer w0.3: U5.43 53.862,28.361 54.483,28.982 54.483,34.036 56.642,36.195 56.642,47.498 57.531,48.387 62.865,48.387 v1(63.5,49.022)
  Bottom Layer w0.3: v1(63.5,49.022) 66.675,49.022 JP16.3
RX2: JP25.3 U5.17 | length 49.8
  Top Layer w0.3: v1@24.765,31.623 v1(24.892,31.623) 25.019,31.75 25.019,46.609 30.353,51.943 JP25.3 ; v1(35.814,19.939) 36.322,19.939 36.725,20.342 U5.17
  Bottom Layer w0.3: v1(24.892,31.623) 24.892,20.023 27.135,17.78 34.163,17.78 35.814,19.431 v1(35.814,19.939)
RX3: JP26.3 U5.30 | length 29.1
  Top Layer w0.3: U5.30 43.225,20.402 43.815,19.812 43.815,15.748 44.45,15.113 v1(46.609,15.113) ; v1(51.054,15.24) 51.054,15.113 52.705,13.462 61.595,13.462 64.008,11.049 JP26.3
  Bottom Layer w0.3: v1(46.609,15.113) 46.736,14.986 50.8,14.986 v1(51.054,15.24)
SCL: R1.2 U5.20 U9.23 | length 42.2
  Top Layer w0.254: U9.23 14.315,26.665 15.499,26.665 15.875,26.289 17.987,26.289 R1.2@19.217,27.519 ; R1.2 18.921,25.532 18.215,24.826 18.215,17.018 19.104,16.129 26.797,16.129 27.432,15.494 30.995,15.494 31.309,15.808 ; 31.249,15.748 35.052,19.551 35.052,21.313 36.726,22.987 37.846,22.987 38.225,22.608 U5.20
SDA: R2.2 U5.21 U9.24 | length 43.8
  Top Layer w0.254: U9.24 16.864,27.198 R2.2 16.936,27.223 18.034,28.321 19.436,28.321 19.898,27.859 19.898,25.867 18.669,24.638 18.669,17.206 19.238,16.637 27.051,16.637 27.686,16.002 30.861,16.002 31.242,16.383 ; 31.115,16.256 31.242,16.383 ; U5.21 38.725,22.75 37.98,23.495 36.592,23.495 34.598,21.501 34.598,19.739 31.242,16.383
TX1: JP16.2 U5.42 | length 41
  Top Layer w0.3: U5.42 50.938,27.861 ; 50.947,27.852 54.06,27.852 54.991,28.783 54.991,33.837 57.15,35.996 57.15,47.244 57.74,47.834 63.705,47.834 67.056,51.185 JP16.2
TX2: JP25.2 U5.16 | length 45.2
  Top Layer w0.3: JP25.2 27.93,50.282 24.384,46.736 24.384,32.385 24.13,32.131 24.13,31.115 24.384,30.861 24.384,23.876 25.265,22.995 30.309,22.995 32.893,25.579 v1(32.893,26.035) ; v1(33.02,23.241) 33.14,23.361 U5.16 ; v1@33.274,23.368 v1@33.281,23.361
  Bottom Layer w0.3: 32.893,24.257 32.893,24.511 ; v1(32.893,26.035) 32.893,24.511 ; v1(33.02,23.241) 32.893,23.368 32.893,24.511
TX3: JP26.2 U5.29 | length 35.3
  Top Layer w0.3: U5.29 42.725,20.013 43.307,19.431 43.307,15.367 44.323,14.351 v1(45.72,14.351) ; v1(51.308,16.256) 53.594,13.97 62.992,13.97 JP26.2
  Bottom Layer w0.3: v1(45.72,14.351) 45.785,14.286 51.497,14.286 51.943,14.732 51.943,15.621 v1(51.308,16.256) ; JP26.2@66.548,10.287 JP26.2
VCC-ADJ: C9.2 C13.1 C24.1 C25.1 C59.2 C60.2 J4.1 JP24.1 JP25.1 JP27.7 L4.2 R35.2 U1.12 U7.10 U8.1 U8.3 U10.6 U11.6 | length 203.6
  Top Layer w0.3: v1(54.483,20.574) 56.261,22.352 58.801,22.352 59.168,22.719 U1.12
  Top Layer w0.5: v1(50.673,29.845) v1(51.689,29.845) 52.959,29.845 53.594,30.48 53.594,34.163 55.245,35.814 JP27.7 ; v1(51.054,23.622) 51.435,23.241 51.435,20.447 51.562,20.32 v1(51.943,20.32)
  Top Layer w1: J4.1 24.232,2.184 U7.10@29.083,2.184
  Bottom Layer w0.3: v1@54.356,20.701 v1(54.483,20.574)
  Bottom Layer w0.5: C59.2 11.047,25.402 12.446,24.003 12.446,22.479 13.081,21.844 U11.6 ; 11.811,35.816 11.811,36.623 ; 12.7,35.816 12.618,35.816 11.811,36.623 ; U10.6 15.367,32.258 ; 15.522,32.258 15.367,32.258 ; 15.748,32.258 15.367,32.258 ; 15.773,31.623 15.773,31.852 15.367,32.258 ; 15.773,31.993 15.773,32.258 ; 15.773,32.766 15.773,32.664 15.367,32.258 ; 15.861,26.049 16.383,25.527 ; 15.875,25.019 16.383,25.527 ; JP25.1 17.272,51.943 11.811,46.482 11.811,36.623 ; U8.3 29.686,6.509 29.337,6.858 29.337,8.128 29.718,8.509 U8.1 32.338,8.509 C9.2 32.51,13.714 C13.1 32.512,16.51 ; 32.004,17.018 32.512,16.51 ; 33.02,17.018 32.512,16.51 ; C24.1 37.064,18.268 35.794,18.268 34.544,17.018 32.512,17.018 ; C25.1@42.164,18.288 44.069,20.193 45.593,20.193 51.054,20.193 v1(51.181,20.32) v1(51.943,20.32) 54.229,20.32 v1(54.483,20.574) ; v1@50.628,29.763 v1@50.628,29.546 ; v1@50.673,29.591 v1@50.628,29.546 ; v1(51.435,22.86) 51.435,23.241 v1(51.054,23.622) 50.213,23.622 49.53,24.305 49.53,26.162 50.548,27.18 R35.2 v1@50.628,29.546 ; v1(51.689,29.845) 51.054,29.845 50.927,29.845 v1@50.628,29.546 ; 11.811,36.623 C60.2 14.988,35.816 15.71,35.094 15.71,32.321 15.773,32.258 ; U11.6 U11.6@15.113,21.844 ; U11.6 U11.6@15.113,21.844 ; U11.6@15.113,21.844 15.684,22.415 15.773,22.504 15.773,32.258 ; 15.875,25.527 15.861,25.541 15.875,25.527 ; 15.875,25.527 16.383,25.527 ; 16.383,25.527 17.399,25.527 20.32,25.527 21.082,24.765 21.082,22.352 JP24.1 26.416,17.018 29.21,17.018 32.512,17.018 ; 32.512,16.51 32.512,17.018
  Bottom Layer w1: J4.1 24.892,1.524 33.401,1.524 38.86,6.983 C24.1 C25.1@42.144,18.268
  Bottom Layer w1.5: L4.2 C25.1@42.54,17.912
pads on no net: JP24.3 U1.3 U1.18 U2.2 U5.2 U5.50 U9.2 U9.3 U9.4 U9.5 U9.6 U9.7 U9.14 U9.15 U9.16 U9.17 U9.19 U9.21 U9.22 U10.1 U10.4 U10.7 U10.8 U11.1 U11.4 U11.7 U11.8

## Polygon pours and split planes (outlines as drawn)
GND on Top Layer "Top Layer-No Net" (solid, remove dead copper, pour order 1000): 4.572,53.467 76.073,53.467 78.867,50.673 78.867,4.318 75.819,1.27 4.572,1.27 2.032,3.81 2.032,50.546
GND on Bottom Layer "Top Layer-No Net" (solid, remove dead copper, pour order 1001): 5.207,53.467 76.073,53.467 78.105,51.435 78.105,3.556 75.565,1.016 75.438,1.143 4.572,1.143 1.905,3.81 1.905,50.165

## Keep-outs
Keep-Out Layer:
  lines w0.127: -0.047,49.991 cw(c4.953,49.991) 4.953,54.991 ; 0,50.165 0,4.953 ccw(c5,4.953) 5,-0.047 ; 4.835,55 75.048,55 ; 4.953,0 75.057,0 ccw(c75.057,5) 80.057,5 ; 14.468,24.511 14.491,24.511 ; 75.01,55.038 cw(c75.01,50.038) 80.01,50.038 ; 80,4.943 80,50.048

## Other copper
Bottom Layer:
  pour cut-out: 43.561,13.716 43.688,13.843 53.467,13.843 53.467,0.889 52.959,0.381 52.832,0.508 43.561,0.508
  pour cut-out: 22.606,2.032 35.052,2.032 35.052,0.381 22.606,0.381

## Silkscreen, mask and mechanical layers (free items; w line width, h text height)
Top Overlay:
  lines w0.127: 22.436,40.704 cw(c12.853,43.564) 22.59,45.843 ; 52.451,40.132 53.086,40.132 ; 54.737,40.005 55.626,40.005 ; 55.245,39.497 55.245,40.386 ; 1.397,16.51 21.082,16.51 21.082,32.512 1.397,32.512 1.397,16.51
  text "+ T R G R L" at 15.494,53.467 h1.5
  text "+ T R G" at 75.057,49.276 h1.5
  text "HALO v1.0 by Aysi" at 1.143,48.514 h1.5 r270
  text "G R T 12" at 53.34,13.97 h1.5
Top Solder:
  region: 57.658,29.591 57.658,33.147 59.309,34.798 71.12,34.798 71.882,34.036 71.882,29.591 70.993,28.702 58.547,28.702

## Text inside footprints (layer, text, board x,y; h text height)
BT1: Top Overlay "+" at 23.31,39.637 h0.8 r90